# Altium PCB PCB1.PcbDoc
Units mil, origin at the board's own origin, x right, y up, seen from the top; angles counter-clockwise.
Board outline 6000 x 4000 mil, 2 copper layers (Top Layer, Bottom Layer); 14 components, 17 nets, 70 pads, 0 vias.
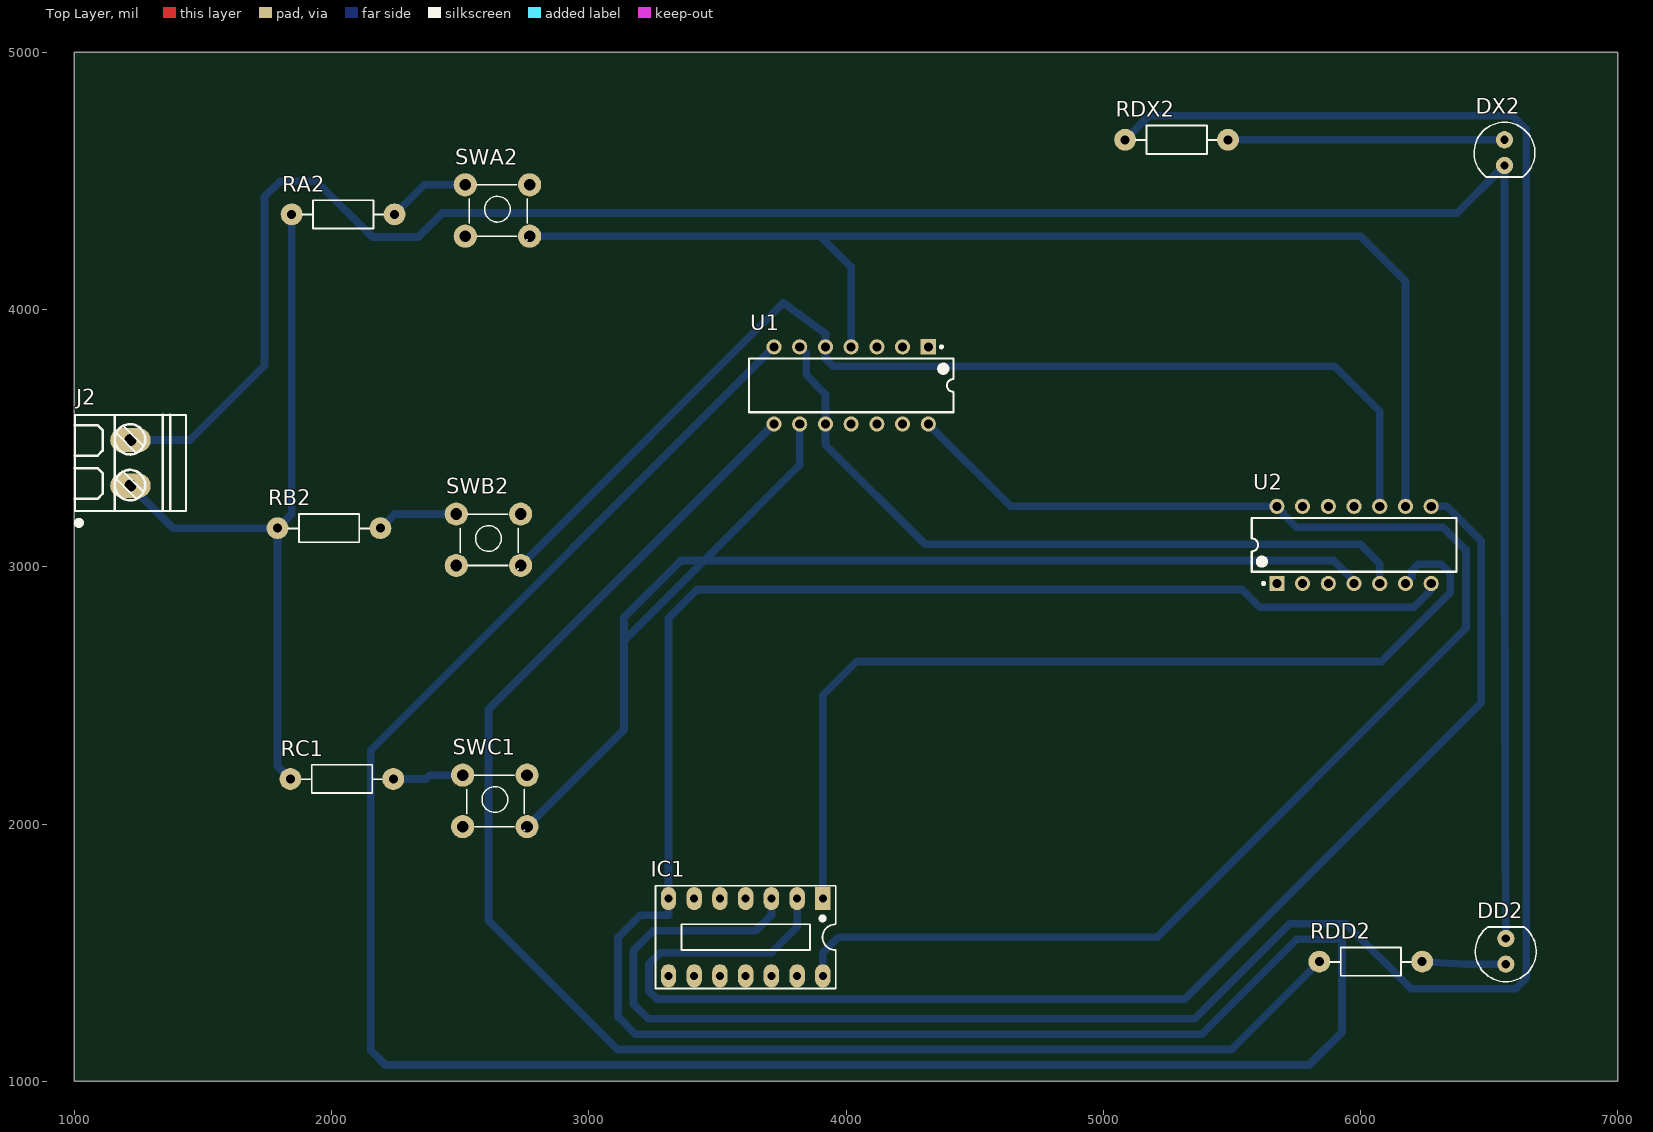
[diagram p0: Top Layer view]
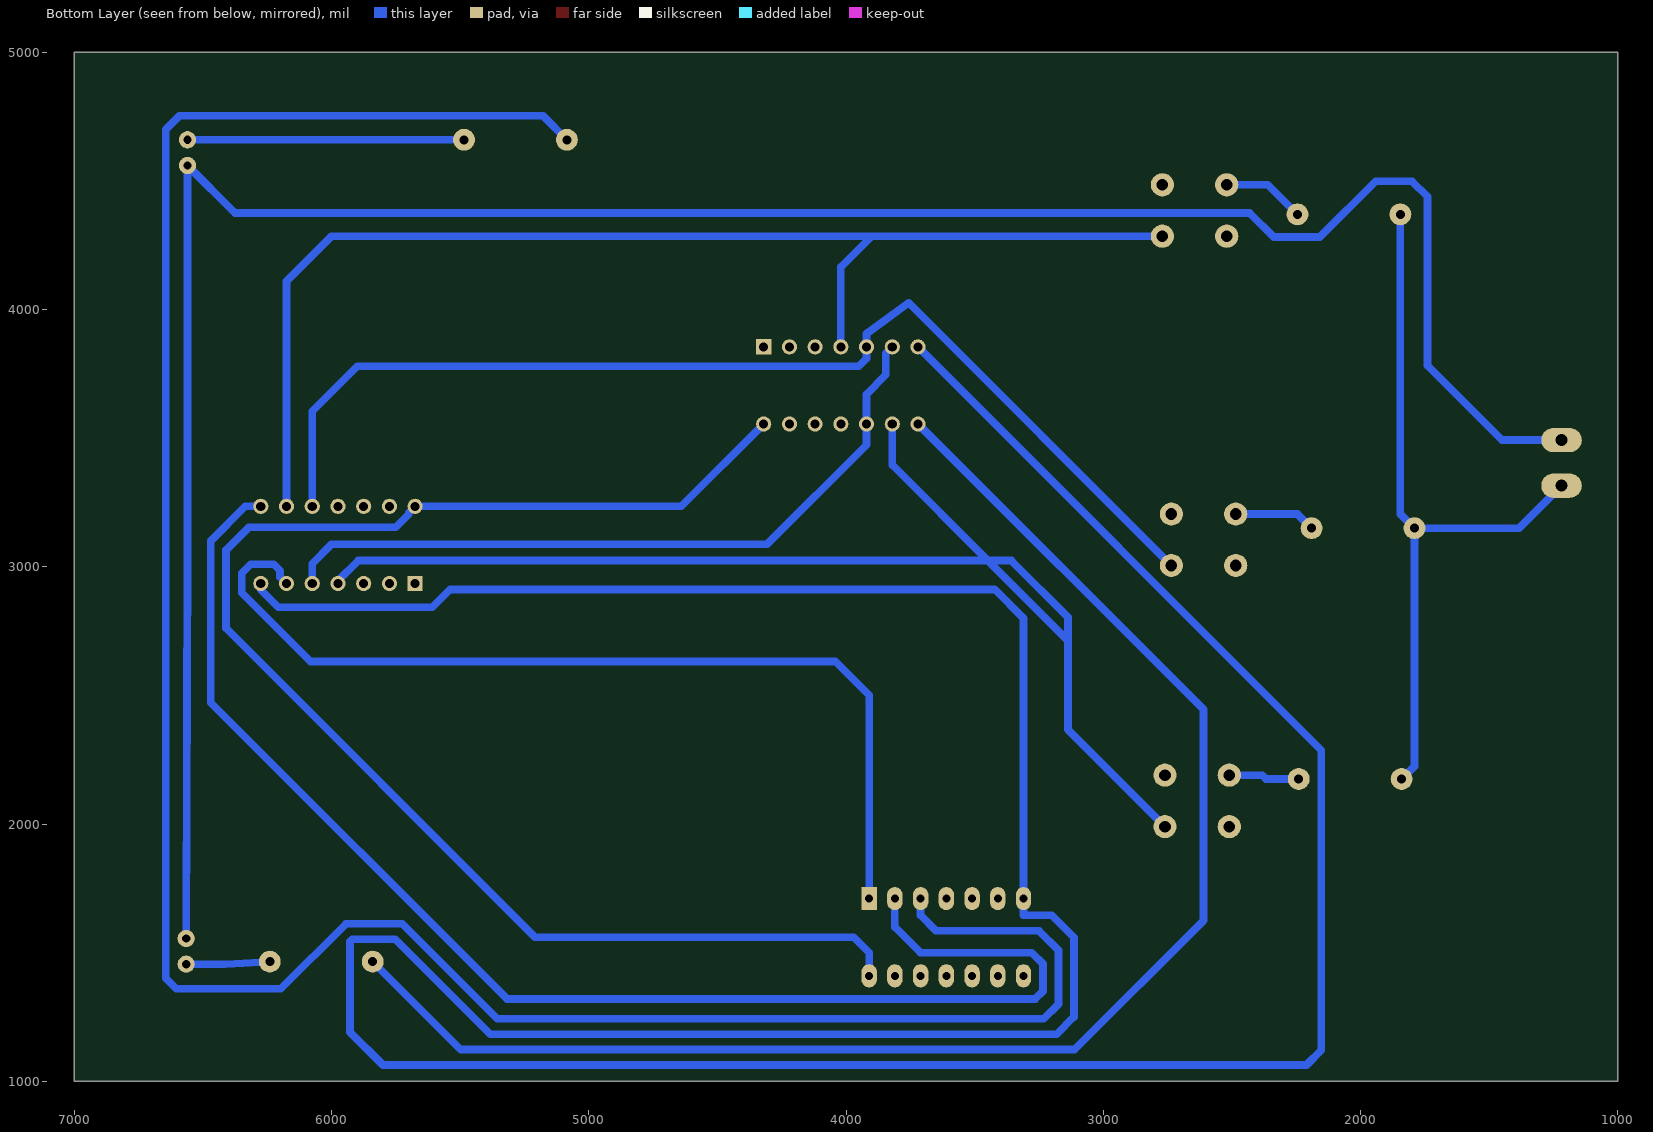
[diagram p1: Bottom Layer view, seen from below]
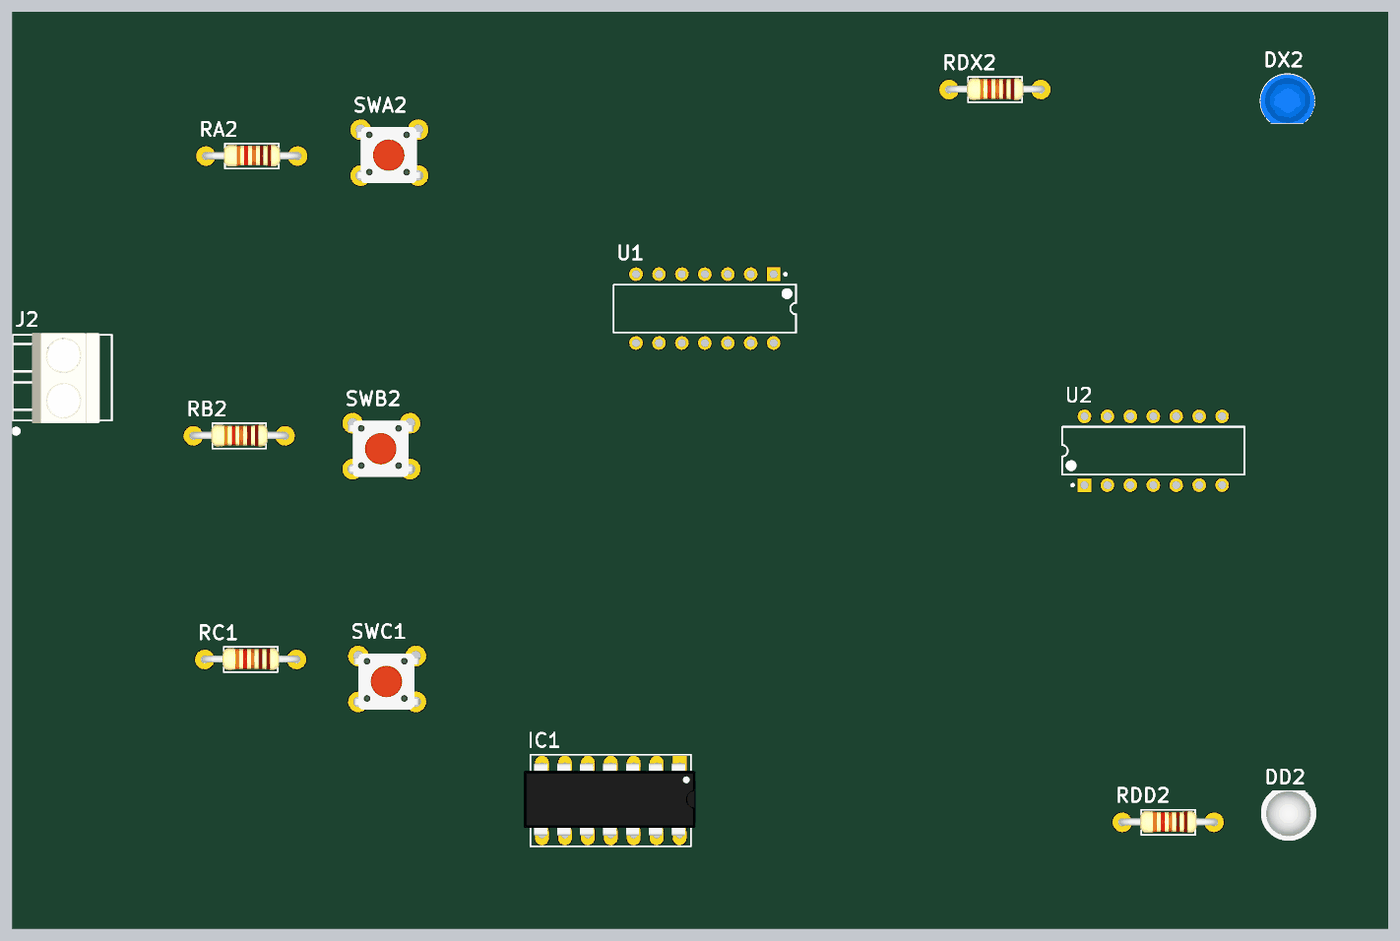
[diagram p2: 3D render of the assembled board from above, using the file's embedded part models]

## Layer stack, top to bottom
Top Solder: solder mask 0.4, Solder Resist, Dk 3.5
Top Layer: signal copper 1.4
Dielectric 1: dielectric 12.6, FR-4, Dk 4.8
Bottom Layer: signal copper 1.4
Bottom Solder: solder mask 0.4, Solder Resist, Dk 3.5

## Board outline
1000,1000 7000,1000 7000,5000 1000,5000

## Design rules (kind name [scope] priority, off if disabled: settings)
Clearance [All] p1: gap=30
PolygonConnect [All] p1: connectstyle=Relief reliefconductorwidth=10 reliefentries=4 polygonreliefangle="90 Angle" airgapwidth=10
RoutingLayers [All] p1: top layer_v5=FALSE bottom layer_v5=TRUE
RoutingVias [All] p1: holewidth=28 width=80 viastyle="Through Hole" minholewidth=28 minwidth=80 maxholewidth=28 maxwidth=80
SolderMaskExpansion [All] p1: expansion=4
Width [All] p1: maxlimit=30 minlimit=20 preferedwidth=30
29 further rules are at their usual default settings.

## Components (designator, comment, footprint, x,y, rotation, side; value= is the part's Value field where it differs from the comment)
DD2 "LED" "LED-0 5mm RED" 6565,1505 r180 top
DX2 "LED" "LED-0 5mm BLUE" 6560,4610 r0 top
IC1 "7432" DIP14/W0.3 3910,1710 r180 top
J2 "CON.Domino2" "Domino 2M" 1435,3590 r180 top
RA2 "1k" R1/2W 1845,4370 r0 top
RB2 "1k" R1/2W 1790,3150 r0 top
RC1 "1k" R1/2W 1840,2175 r0 top
RDD2 "1k" R1/2W 5840,1465 r0 top
RDX2 "1k" R1/2W 5085,4660 r0 top
SWA2 "SW" SW4 2520,4485 r0 top
SWB2 "SW" SW4 2485,3205 r0 top
SWC1 "SW" SW4 2510,2190 r0 top
U1 "7486" DIP-14 4020,3705 r270 top
U2 "7408" DIP-14 5975,3085 r90 top

## Footprints (in the part's own frame and the unit in brackets; to place one, negate y for a bottom-side part, rotate by r counter-clockwise, add the part's x,y. Pads: shape width x height; smd on the part's side, far side on the other; paste and mask are expansions set on the pad)
DIP14/W0.3 [mil] "14PIN, W 300mil, Pin to pin 100mil"
  rect 60x90 hole 31: 1(0,0)
  oval 60x90 hole 31: 2(100,0) 3(200,0) 4(300,0) 5(400,0) 6(500,0) 7(600,0) 8(600,300) 9(500,300) 10(400,300) 11(300,300) 12(200,300) 13(100,300) 14(0,300)
  silkscreen extent -50,-50 650,350, body extent -70,-12 680,302, height 145
DIP-14 [mm] "DIP; 14 Leads; Row Spacing 7.62 mm; Pitch 2.54 mm"
  rect 1.5x1.5 hole 0.9: 1(-3.81,7.62)
  round 1.5 hole 0.9: 2(-3.81,5.08) 3(-3.81,2.54) 4(-3.81,0) 5(-3.81,-2.54) 6(-3.81,-5.08) 7(-3.81,-7.62) 8(3.81,-7.62) 9(3.81,-5.08) 10(3.81,-2.54) 11(3.81,0) 12(3.81,2.54) 13(3.81,5.08) 14(3.81,7.62)
  silkscreen extent -3.93,-10.1 2.65,10.1, body extent -3.6,-10.1 3.6,10.1, height 5.08
"Domino 2M" [mm]
  oval 4x2.4 hole 1.2: 1(5.5,6.975) 2(5.5,2.475)
  silkscreen extent 0,0 11,10.9, body extent 1.35,-0.22 8.85,9.78, height 10
"LED-0 5mm BLUE" [mil] "Typical LED; BLUE; 2 Leads; Solder Pad 35mil"
  round 67 hole 32: 1(0,50) 2(0,-50)
  silkscreen extent -118,-96 118,118, body extent -118,-96 119,117, height 345
"LED-0 5mm RED" [mil] "Typical LED; RED; 2 Leads; Solder Pad 35mil"
  round 67 hole 32: 1(0,50) 2(0,-50)
  silkscreen extent -118,-96 118,118, body extent -118,-96 119,117, height 345
R1/2W [mil] "R 1/2W, 2 pin, 300mil"
  round 85 hole 35: 1(0,0) 2(400,0)
  silkscreen extent 42,-55 356,55, body extent -12,-45 414,49, height 91
SW4 [mil] "SW button 4pin, 250 x250 mil"
  round 90 hole 45: 1(0,0) 2(250,-200) 3(250,0) 4(0,-200)
  silkscreen extent 15,-215 240,0, body extent -34,-233 278,11, height 276

## Part data
DD2 DX2: "Typical LED"
IC1: "Quad 2-Input OR Gate"
J2: "2 pins Domino Header"
RA2 RB2 RC1 RDD2 RDX2: library part R1/4W, "Resistor 1/4W"
SWA2 SWB2 SWC1: library part SW4, "Switch button 4 pin"
U1: "2-Input Exclusive-OR Gate"
U2: "Quad 2-Input AND Gate"

## Nets (pads, with @x,y where several pads share a name; then routed paths per layer and width w, separated by ;. In a path a pad name is that pad's centre, name@x,y a point inside that pad or via, vN(x,y) a via of type N, cw(c..) or ccw(c..) an arc to the next point about the centre after c; other vN are vias at no path point)
GND: IC1.7 U1.7 U2.7 | length 15375
  Bottom Layer w30: U1.7 2152,2287 2152,1121 2210,1063 5800,1063 5928,1191 5928,1543 5918.5,1552.5 5752,1552.5 5382.5,1183 3181,1183 3114,1250 3114,1559 3200,1645 3310,1645 IC1.7 3310,2800 3422,2912 5539,2912 5608,2843 6207,2843 6275,2911 U2.7
NetDD2_1: DD2.1 RDD2.2 | length 325.3
  Bottom Layer w30: RDD2.2 6413,1455 DD2.1
NetDD2_2: DD2.2 DX2.2 J2.2 | length 9352.7
  Bottom Layer w30: J2.2 1449.56,3492.56 1739,3782 1739,4438 1800,4499 1941,4499 2158,4282 2337,4282 2430,4375 6375,4375 DX2.2 6560,3063 DD2.2
NetDX2_1: DX2.1 RDX2.2 | length 1075
  Bottom Layer w30: RDX2.2 DX2.1
NetIC1_1: IC1.1 U2.6 | length 3705.2
  Bottom Layer w30: IC1.1 3910,2500 4042,2632 6082,2632 6349.53,2899.53 6349.53,2975 6314.53,3010 6225,3010 6200,2985 6200,2960 U2.6
NetIC1_2: IC1.2 U2.8 | length 5455.7
  Bottom Layer w30: IC1.2 3810,1600 3710,1500 3277.92,1500 3234.34,1456.43 3234.34,1350 3264.34,1320 5318,1320 6470,2472 6470,3100 6335,3235 U2.8
NetIC1_3: IC1.3 RDX2.1 | length 9554.5
  Bottom Layer w30: IC1.3 3710,1645 3650,1585 3250,1585 3174,1509 3174,1300 3231,1243 5355.5,1243 5725,1612.5 5943.5,1612.5 6197,1359 6603,1359 6644,1400 6644,4700 6591,4753 5178,4753 RDX2.1
NetJ2_1: J2.1 RA2.1 RB2.1 RC1.1 | length 2878.5
  Bottom Layer w30: J2.1 1383.86,3150 RB2.1 ; RC1.1 1790,2225 RB2.1 ; RA2.1 1845,3205 RB2.1
NetRA2_2: RA2.2 SWA2.1 | length 322.6
  Bottom Layer w30: RA2.2 2360,4485 SWA2.1
NetRB2_2: RB2.2 SWB2.1 | length 317.8
  Bottom Layer w30: RB2.2 2245,3205 SWB2.1
NetRC1_2: RC1.2 SWC1.1 | length 276.2
  Bottom Layer w30: RC1.2 2367,2175 2382,2190 SWC1.1
NetRDD2_1: RDD2.1 U1.8 | length 5969.4
  Bottom Layer w30: U1.8 2610,2445 2610,1625 3112,1123 5498,1123 RDD2.1
NetSWA2_2: SWA2.2 U1.4 U2.9 | length 4832.2
  Bottom Layer w30: SWA2.2 3900,4285 ; U1.4 4020,4165 3900,4285 ; U2.9 6175,4110 6000,4285 3900,4285
NetSWB2_2: SWB2.2 U1.5 U2.10 | length 4353
  Bottom Layer w30: SWB2.2 3756,4026 3920,3906 U1.5 3920,3810 3950,3780 5900,3780 6075,3605 U2.10
NetSWC1_2: SWC1.2 U1.9 U2.4 | length 5066.9
  Bottom Layer w30: SWC1.2 3137,2367 3137,2713 ; U1.9 3820,3396 3448,3024 ; U2.4 5975,2945 5896,3024 3448,3024 ; 3137,2713 3137,2804 3357,3024 3448,3024 ; 3137,2713 3448,3024
NetU1_6: U1.6 U1.10 U2.5 | length 2845.8
  Bottom Layer w30: U1.6 3845,3830 3845,3746 3920,3671 U1.10 3920,3474 4307,3087 6000,3087 6075,3012 U2.5
VCC: IC1.14 U1.14 U2.14 | length 5712.8
  Bottom Layer w30: IC1.14 3910,1500 3970,1560 5209,1560 6410,2761 6410,3065 6321,3154 5750,3154 5700,3204 5700,3210 U2.14 4640,3235 U1.14
pads on no net: IC1.4 IC1.5 IC1.6 IC1.8 IC1.9 IC1.10 IC1.11 IC1.12 IC1.13 SWA2.3 SWA2.4 SWB2.3 SWB2.4 SWC1.3 SWC1.4 U1.1 U1.2 U1.3 U1.11 U1.12 U1.13 U2.1 U2.2 U2.3 U2.11 U2.12 U2.13